# Altium PCB Therm_Expand_PCB_BottomBoard.PcbDoc
Units mil, origin at the board's own origin, x right, y up, seen from the top; angles counter-clockwise.
Board outline 3325 x 2597 mil, 2 copper layers (Top Layer, Bottom Layer); 43 components, 59 nets, 229 pads, 138 vias.
Unrouted connection lines stored in the file: 3.
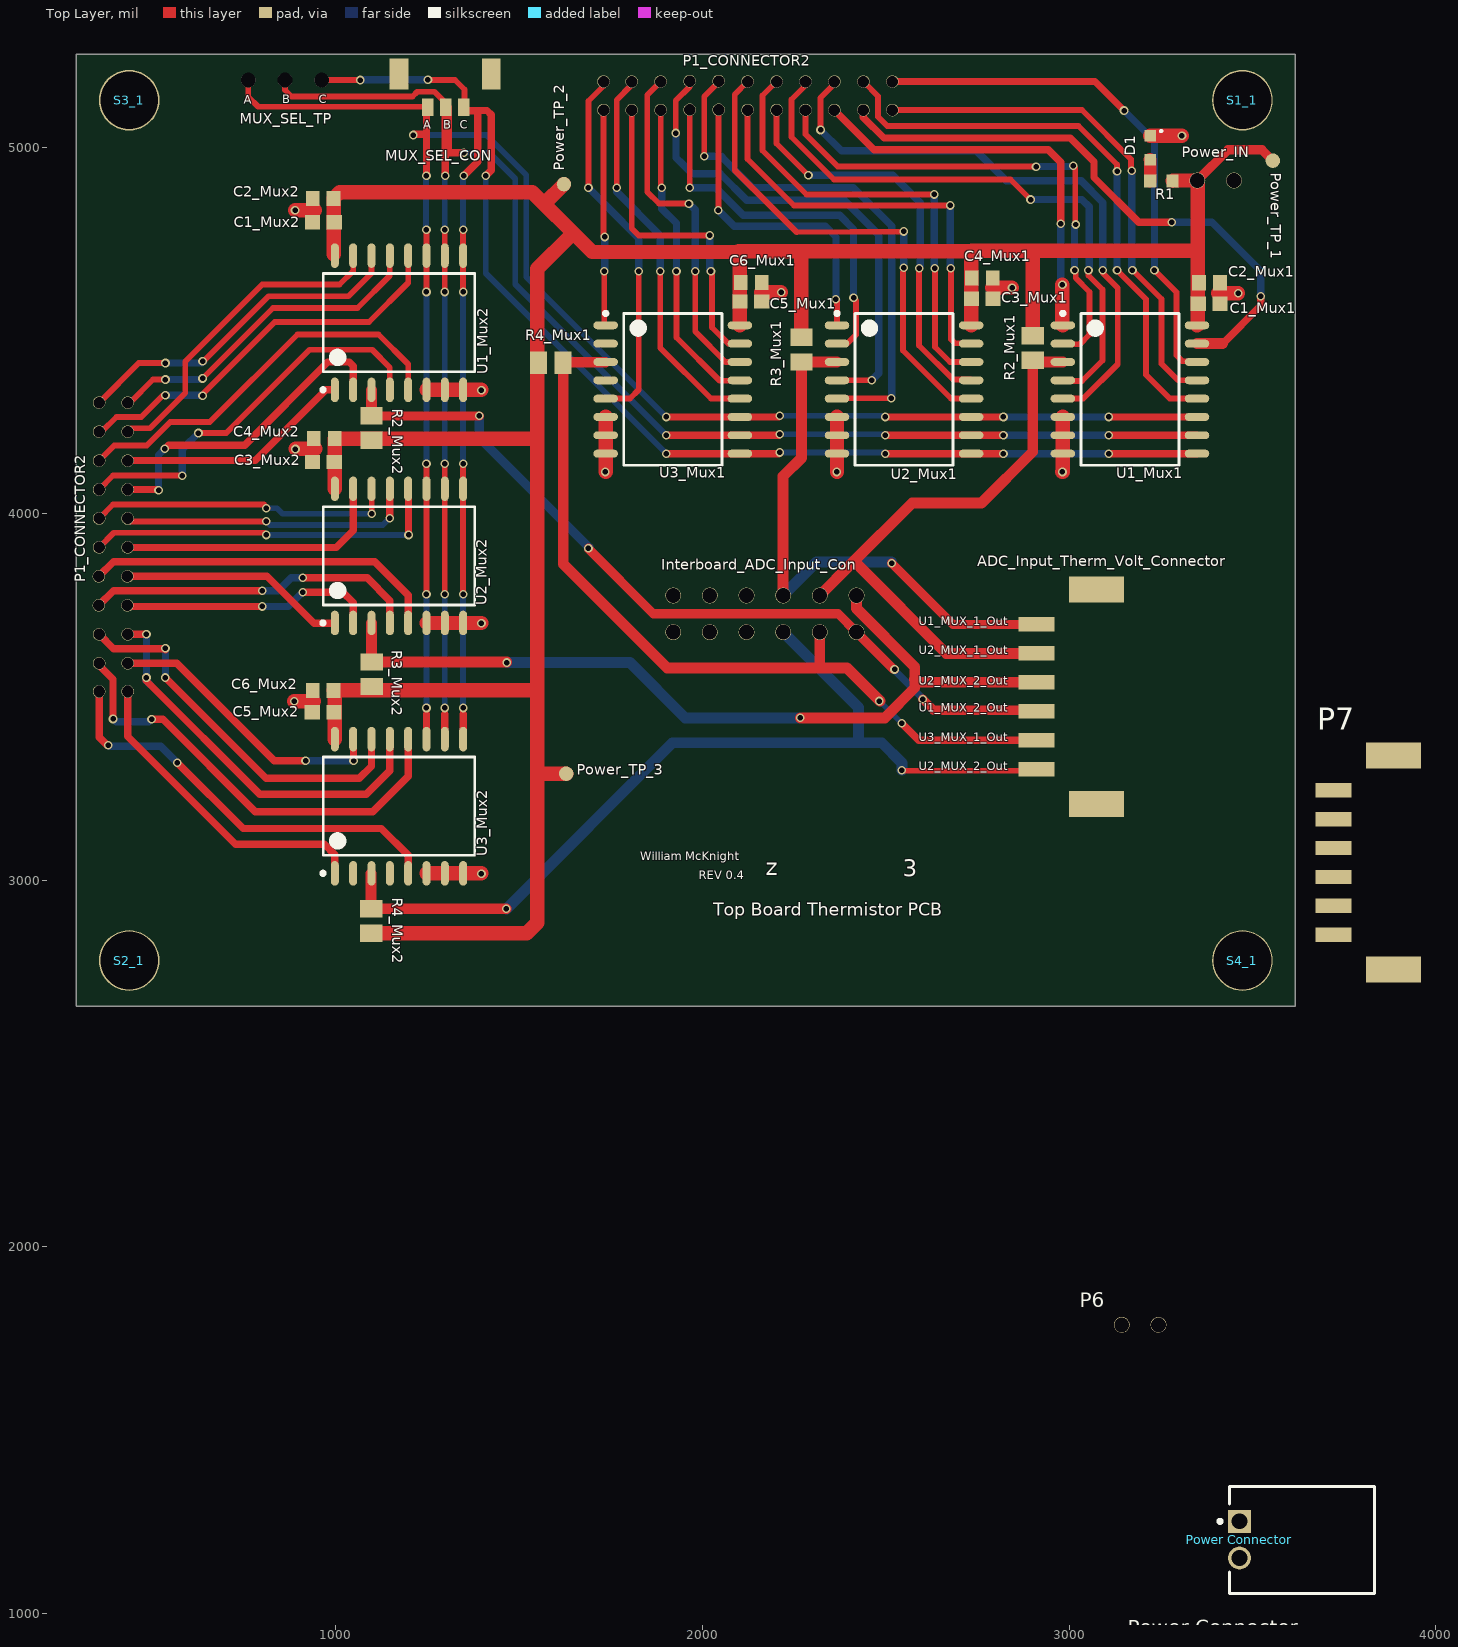
[diagram p0: Top Layer view]
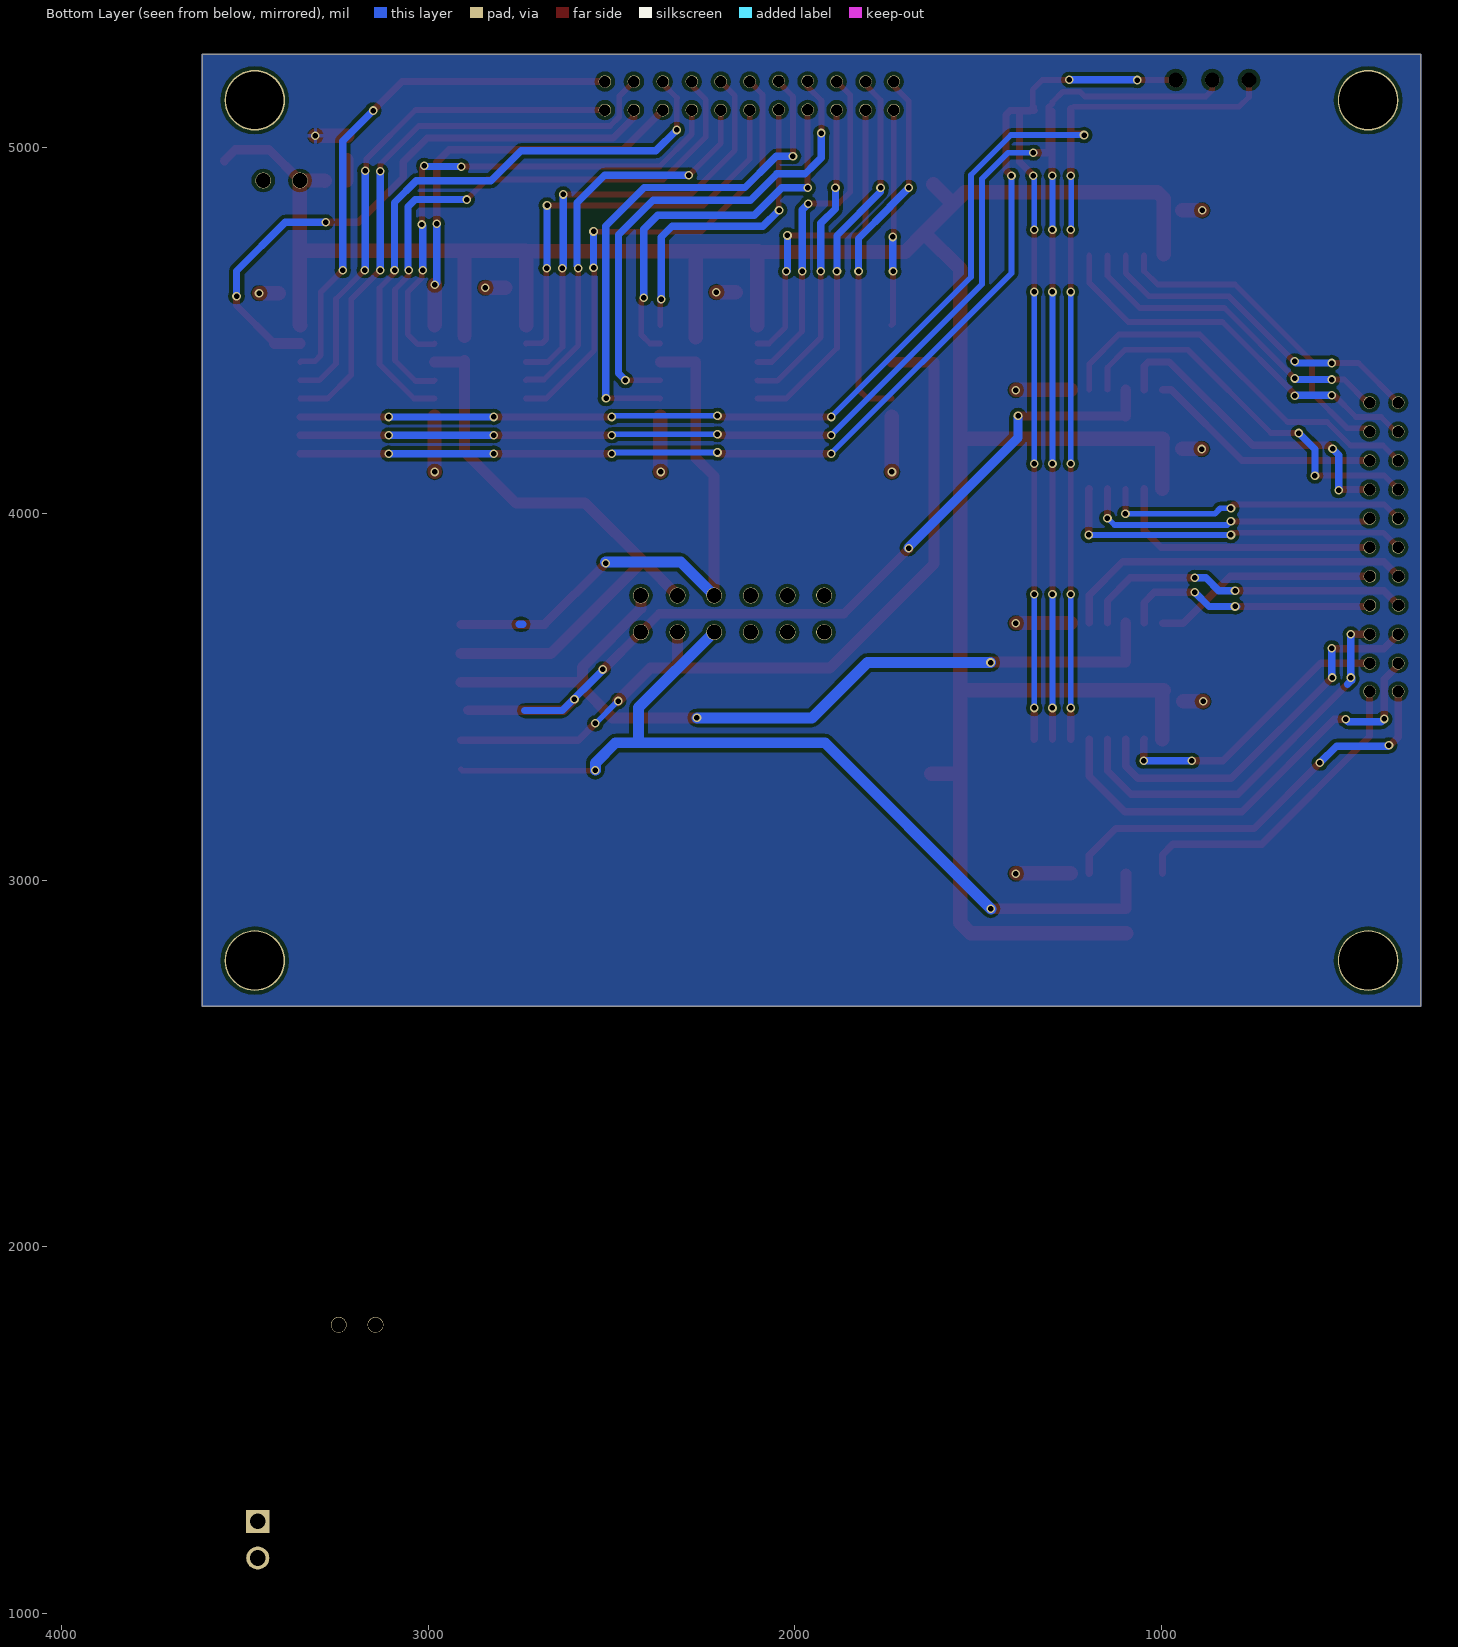
[diagram p1: Bottom Layer view, seen from below]

## Layer stack, top to bottom
Top Solder: solder mask 0.4, Solder Resist, Dk 3.5
Top Layer: signal copper 1.4
Dielectric 1: dielectric 12.6, FR-4, Dk 4.8
Bottom Layer: signal copper 1.4
Bottom Solder: solder mask 0.4, Solder Resist, Dk 3.5

## Board outline
292,2656 3617,2656 3617,5253 292,5253

## Design rules (kind name [scope] priority, off if disabled: settings)
Clearance [All] p1: gap=10 ignorepadtopadclearanceinfootprint=FALSE except(0: Arc-Hole Track-Hole SMDPad-Hole THPad-Hole Via-Hole Fill-Hole Poly-Hole Region-Hole Text-Hole; 5: Arc-Via Track-Via THPad-THPad; 6: Arc-Arc Arc-Track Track-Track)
PolygonConnect [All] p1: connectstyle=Relief reliefconductorwidth=10 reliefentries=4 polygonreliefangle="90 Angle" airgapwidth=10
RoutingVias [All] p1: holewidth=15 width=20 viastyle="Through Hole" minholewidth=12 minwidth=18 maxholewidth=28 maxwidth=32
ShortCircuit [All] p1: allowed=TRUE
SolderMaskExpansion [All] p1: expansion=4
Width [All] p1: maxlimit=100 minlimit=6 preferedwidth=15 minimp=50.000000 maximp=50.000000 favimp=50.000000
29 further rules are at their usual default settings.

## Classes and differential pairs
channel class Multiplexers: Data_TransferA_U_Single_Mux1 Data_TransferB_U_Single_Mux2
channel class MID: Data_TransferA Data_TransferB
channel class 50Pin_Connector: Data_TransferA_U_AHK50H-ND_THERM_CONNECTOR1 Data_TransferB_U_AHK50H-ND_THERM_CONNECTOR2
net class ADC_OUTC[1..2]: ADC_OUTC1 ADC_OUTC2
net class ADC_OUTB[1..2]: ADC_OUTB1 ADC_OUTB2
net class ADC_OUTA[1..2]: ADC_OUTA1 ADC_OUTA2
component class U_Data_Conversion: D1 P6 P7

## Components (designator, comment, footprint, x,y, rotation, side; value= is the part's Value field where it differs from the comment)
ADC_Input_Therm_Volt_Connector "6Pos_ADC_Volt_Test_Connector" 6POS_ADC_Volt_TEST 2911,3303 r90 top
C1_Mux1 "0.1uF" "0.1uF Bypass Capacitor" 3382,4573 r180 top
C1_Mux2 "0.1uF" "0.1uF Bypass Capacitor" 966,4795 r0 top
C2_Mux1 "1uF" 1UF_SAMSUNG 3383,4630 r180 top
C2_Mux2 "1uF" 1UF_SAMSUNG 965,4860 r0 top
C3_Mux1 "0.1uF" "0.1uF Bypass Capacitor" 2763,4586 r180 top
C3_Mux2 "0.1uF" "0.1uF Bypass Capacitor" 966,4141 r0 top
C4_Mux1 "1uF" 1UF_SAMSUNG 2763,4643 r180 top
C4_Mux2 "1uF" 1UF_SAMSUNG 968,4205 r0 top
C5_Mux1 "0.1uF" "0.1uF Bypass Capacitor" 2132,4579 r180 top
C5_Mux2 "0.1uF" "0.1uF Bypass Capacitor" 965,3458 r0 top
C6_Mux1 "1uF" 1UF_SAMSUNG 2133,4631 r180 top
C6_Mux2 "1uF" 1UF_SAMSUNG 965,3518 r0 top
D1 "LED" Green_SMD_LED 3285,5377 r270 top
Interboard_ADC_Input_Con "12 POS ADC Header" "12 POS Dual Header" 1920,3677 r0 top
MUX_SEL_CON "3_POS_MEX_SEL" 3POS_MUX_SEL 1349,5109 r180 top
MUX_SEL_TP "3 POS Mux Select Header" "Mux Select 3 Pos Header Pin" 961,5183 r180 top
P1_CONNECTOR2 "22-Pin-Connector" "22-PIN CONENCTOR" 13916,17320 r90 top
P1_CONNECTOR2 "22-Pin-Connector" "22-PIN CONENCTOR" 15535,-8383 r0 top
P6 "2 Pos Power Header" "2 POS Power Header" 3244,1787 r180 top
P7 "6Pos_ADC_Volt_Test_Connector" 6POS_ADC_Volt_TEST 3721,2851 r90 top
"Power Connector" "2Pos Power Connector" "2POS POWER CONNECTOR" 3464,1200 r90 top
Power_IN "2 Pos Power Header without 3D body" "2 Pos Power Header - duplicate" 3350,4909 r0 top
Power_TP_1 "Test Point" "Test Point" 3556,4963 r90 top
Power_TP_2 "Test Point" "Test Point" 1622,4899 r90 top
Power_TP_3 "Test Point" "Test Point" 1628,3291 r90 top
R1 "Green" Green_LED_Resistor_90.9 3252,4908 r0 top
R2_Mux1 "6.49kOhm SMD Resistor" RESC2012X06N 2901,4452 r90 top
R2_Mux2 "6.49kOhm SMD Resistor" RESC2012X06N 1097,4233.54 r270 top
R3_Mux1 "6.49kOhm SMD Resistor" RESC2012X06N 2270,4447.54 r90 top
R3_Mux2 "6.49kOhm SMD Resistor" RESC2012X06N 1098,3562 r270 top
R4_Mux1 "6.49kOhm SMD Resistor" RESC2012X06N 1586,4412 r180 top
R4_Mux2 "6.49kOhm SMD Resistor" RESC2012X06N 1096,2889 r270 top
S1_1 "#6-32 Standoff" "#6-32 Stand Off"#1 3877,6335 r0 top
S2_1 "#6-32 Standoff" "#6-32 Stand Off"#2 840,3988 r0 top
S3_1 "#6-32 Standoff" "#6-32 Stand Off"#3 840,6335 r0 top
S4_1 "#6-32 Standoff" "#6-32 Stand Off"#4 3877,3988 r0 top
U1_Mux1 "8:1 - MUX" "8X1 16SOIC MUX" 3166,4339 r0 top
U1_Mux2 "8:1 - MUX" "8X1 16SOIC MUX" 1172,4521 r90 top
U2_Mux1 "8:1 - MUX" "8X1 16SOIC MUX" 2550,4339 r0 top
U2_Mux2 "8:1 - MUX" "8X1 16SOIC MUX" 1172,3885 r90 top
U3_Mux1 "8:1 - MUX" "8X1 16SOIC MUX" 1919,4339 r0 top
U3_Mux2 "8:1 - MUX" "8X1 16SOIC MUX" 1172,3202 r90 top

## Footprints (in the part's own frame and the unit in brackets; to place one, negate y for a bottom-side part, rotate by r counter-clockwise, add the part's x,y. Pads: shape width x height; smd on the part's side, far side on the other; paste and mask are expansions set on the pad)
"0.1uF Bypass Capacitor" [mm] "Chip Capacitor, 2-Leads, Body 1.60x0.80mm, IPC Medium Density"
  rect 1.05x1 smd: 1(-0.75,0) 2(0.75,0)
  body extent -0.87,-0.48 0.87,0.48, height 0.9
1UF_SAMSUNG [mm]
  rect 0.95x1.05 smd: 1(-0.725,0) 2(0.725,0)
  body extent -0.85,-0.45 0.85,0.45, height 0.9
"2 POS Power Header" [mm] "Connecting Power between boards"
  round 1.1 hole 1.02: 1(0,0) 2(2.54,0)
  body extent -1.54,-1.3 3.92,1.24, height 10.04
"2 Pos Power Header - duplicate" [mm] "Without 3D body,"
  round 1.1 hole 1.02: 1(0,0) 2(2.54,0)
"2POS POWER CONNECTOR" [mm]
  rect 1.6x1.6 hole 1.09: 1(1.295,-0.025)
  round 1.6 hole 1.09: 2(-1.245,-0.025)
  silkscreen extent -3.71,-9.38 3.71,1.45, body extent -3.66,-12.91 3.71,0.67, height 6.98
3POS_MUX_SEL [mm] "CONN HEADER SMD R/A 3POS 1.25MM"
  rect 0.8x1.2 smd: 1(0,0) 2(1.245,0) 3(2.489,0)
  rect 1.3x2.15 smd: 4(-1.905,-2.286) 5(4.496,-2.286)
  body extent -2.28,-3.84 4.72,0.36, height 3.91
6POS_ADC_Volt_TEST [mm] "CONN HEADER SMD R/A 6POS 2MM"
  rect 1x2.5 smd: 1(0,0) 2(2.007,0) 3(4.013,0) 4(6.02,0) 5(8.026,0) 6(10.033,0)
  rect 1.8x3.8 smd: 7(-2.413,-4.166) 8(12.446,-4.166)
"8X1 16SOIC MUX" [mm] "IC MUX/DEMUX 8X1 16SOIC"
  oval 1.7x0.55 smd: 1(-4.65,4.445) 2(-4.65,3.175) 3(-4.65,1.905) 4(-4.65,0.635) 5(-4.65,-0.635) 6(-4.65,-1.905) 7(-4.65,-3.175) 8(-4.65,-4.445) 9(4.65,-4.445) 10(4.65,-3.175) 11(4.65,-1.905) 12(4.65,-0.635) 13(4.65,0.635) 14(4.65,1.905) 15(4.65,3.175) 16(4.65,4.445)
  silkscreen extent -4.77,-5.25 3.4,5.39, body extent -5.15,-5.25 5.15,5.25, height 2.65
"12 POS Dual Header" [mm] "Board to Board ADC Channel Header"
  round 1.1 hole 1.02: 1(0,0) 2(0,2.54) 3(2.54,2.54) 4(2.54,0) 5(5.08,0) 6(5.08,2.54) 7(7.62,2.54) 8(7.62,0) 9(10.16,0) 10(10.16,2.54) 11(12.7,2.54) 12(12.7,0)
  body extent -1.27,-3.18 13.97,4.7, height 20.46
"22-PIN CONENCTOR" [mil]
  round 34 hole 31.5: 1(-13017,13484) 2(-13017,13562) 3(-13096,13484) 4(-13096,13562) 5(-13175,13484) 6(-13175,13562) 7(-13254,13484) 8(-13254,13562) 9(-13333,13484) 10(-13333,13562) 11(-13412,13484) 12(-13412,13562) 13(-13491,13485) 14(-13491,13563) 15(-13570,13485) 16(-13570,13563) 17(-13649,13484) 18(-13649,13562) 19(-13728,13484) 20(-13728,13562) 21(-13805,13484) 22(-13805,13562)
  body extent -13883,13472 -12939,13866, height 199
"#6-32 Stand Off"#1 [mm]
  round 4.2 hole 4: S1(-10.262,-30.658)
  body extent -13.92,-33.83 -6.6,-27.48, height 10.32
"#6-32 Stand Off"#2 [mm]
  round 4.2 hole 4: S3(-10.262,-30.658)
  body extent -13.92,-33.83 -6.6,-27.48, height 10.32
"#6-32 Stand Off"#3 [mm]
  round 4.2 hole 4: S2(-10.262,-30.658)
  body extent -13.92,-33.83 -6.6,-27.48, height 10.32
"#6-32 Stand Off"#4 [mm]
  round 4.2 hole 4: S4(-10.262,-30.658)
  body extent -13.92,-33.83 -6.6,-27.48, height 10.32
Green_LED_Resistor_90.9 [mm]
  rect 0.85x0.9 smd: 1(-0.775,0) 2(0.775,0)
  body extent -0.85,-0.45 0.85,0.45, height 0.55
Green_SMD_LED [mil]
  rect 31.5x31.5 smd: 1(346,-64) 2(411,-64)
  silkscreen extent 332,-35 334,-33, body extent 346,-79 410,-48, height 28
"Mux Select 3 Pos Header Pin" [mm]
  round 1 hole 1.02: 1(0,0) 2(2.54,0) 3(5.08,0)
  body extent -1.19,-7.26 6.43,1.24, height 5.77
RESC2012X06N [mm] "Chip Resistor, 2-Leads, Body 2.00x1.25mm, IPC Medium Density"
  rect 1.2x1.55 smd: 1(-0.85,0) 2(0.85,0)
  body extent -1.1,-0.58 1.1,0.58, height 0.6
"Test Point" [mm]
  round 1 smd: 1(0,0)

## Part data
ADC_Input_Therm_Volt_Connector P7: "Connector Header Surface Mount, Right Angle 6 position 0.079\" (2.00mm)", Manufacturer=Molex, Manufacturer Part Number=5055780671, Supplier Part Number 1=WM17945CT-ND, Pricing 1="1=1.02000, 10=0.89300, 100=0.77050 (USD)", RoHS=No, Stock 1=3435, Supplier 1=Digi-Key
C1_Mux1 C1_Mux2 C3_Mux1 C3_Mux2 C5_Mux1 C5_Mux2: library part "0.1uF Cap", "0.1uF Bypass Cap", Case/Package=0603, Case Code (Metric)=1608, Dielectric=X7R, Dielectric Material=Ceramic, Manufacturer=KEMET, Manufacturer Part Number=C0603C104K9RACTU, Max Operating Temperature=125°C, Min Operating Temperature=-55°C, Package Quantity=4000, Supplier Part Number 1=399-15351-1-ND, Tolerance=10%, Voltage Rating=6.3V, Case Code (Imperial)=0603, ComponentLink1Description=https://datasheet.ciiva.com/13371/kem-c1002-x7r-smd-357932-13371879.pdf?src-supplier=Mouser, ComponentLink1URL=https://datasheet.ciiva.com/13371/kem-c1002-x7r-smd-357932-13371879.pdf?src-supplier=Mouser, Dissipation Factor=5%, Height=0.8mm, Length=1.6mm, Mount="Surface Mount", Packaging="Tape and Reel", Pricing 1="1=0.19000, 10=0.13800, 100=0.06480, 500=0.04546, 1000=0.03763 (USD)", RoHS=Yes, Stock 1=758, Supplier 1=Digi-Key, Termination=SMD/SMT, Thickness=0.034inch, Voltage Rating (DC)=6.3V, Width=0.8mm
C2_Mux1 C2_Mux2 C4_Mux1 C4_Mux2 C6_Mux1 C6_Mux2: library part "1uF Samsung Cap", "1uF Samsung Cap", Case/Package=0603, Case Code (Metric)=1608, Dielectric=X7R, Manufacturer=Samsung, Manufacturer Part Number=CL10B105KP8NNNC, Max Operating Temperature=125°C, Min Operating Temperature=-55°C, Package Quantity=1, Supplier Part Number 1=1276-1946-1-ND, Tolerance=10%, Voltage Rating=10V, Capacitance=1uF, Case Code (Imperial)=0603, ComponentLink1Description=https://media.digikey.com/pdf/Data%20Sheets/Samsung%20PDFs/CL_Series_MLCC_ds.pdf?src-supplier=Digi-Key, ComponentLink1URL=https://media.digikey.com/pdf/Data%20Sheets/Samsung%20PDFs/CL_Series_MLCC_ds.pdf?src-supplier=Digi-Key, ComponentLink2Description=http://www1.futureelectronics.com/doc/SAMSUNG/CL10B105KP8NNNC.pdf?src-supplier=Future+Electronics, ComponentLink2URL=http://www1.futureelectronics.com/doc/SAMSUNG/CL10B105KP8NNNC.pdf?src-supplier=Future+Electronics, ComponentLink3Description=https://www.verical.com/server-webapp/html/getDatasheet?partID=358410&src-supplier=Verical, ComponentLink3URL=https://www.verical.com/server-webapp/html/getDatasheet?partID=358410&src-supplier=Verical, Contact Plating=Tin, Depth=0.8mm, Height=0.8mm, Lead Free="Lead Free", Length=1.6mm, Mount="Surface Mount", Packaging="Tape and Reel", Pricing 1="1=0.1, 10=0.052, 100=0.0233, 500=0.0166, 1000=0.0131 (USD)", Radiation Hardening=No, Stock 1=10781730, Supplier 1=Digi-Key, Thickness=0.035inch, Voltage Rating (DC)=10V, Width=0.031inch
D1: library part GREEN_LED, Case/Package=0603, Case Code (Metric)=1608, Color=Green, Forward Current=20mA, Forward Voltage=2V, Lens Color=Colorless,Clear, Manufacturer=Dialight, Manufacturer Part Number=5988070107F, Max Operating Temperature=100°C, Min Operating Temperature=-30°C, Package Quantity=4000, Power Dissipation=60mW, Reverse Voltage=5V, Supplier Part Number 1=350-2035-1-ND, Case Code (Imperial)=0603, ComponentLink1Description=http://www.mouser.com/ds/2/109/SMT_selector_guide-267443.pdf?src-supplier=Mouser, ComponentLink1URL=http://www.mouser.com/ds/2/109/SMT_selector_guide-267443.pdf?src-supplier=Mouser, ComponentLink2Description=http://uk.rs-online.com/webdocs/0ae2/0900766b80ae2975.pdf?src-supplier=RSComponents, ComponentLink2URL=http://uk.rs-online.com/webdocs/0ae2/0900766b80ae2975.pdf?src-supplier=RSComponents, ComponentLink3Description=http://www.farnell.com/datasheets/1720200.pdf?src-supplier=Element14, ComponentLink3URL=http://www.farnell.com/datasheets/1720200.pdf?src-supplier=Element14, ComponentLink4Description=https://media.digikey.com/pdf/Data%20Sheets/Dialight%20PDFs/598_Series_0603_Pkg.pdf?src-supplier=Digi-Key, ComponentLink4URL=https://media.digikey.com/pdf/Data%20Sheets/Dialight%20PDFs/598_Series_0603_Pkg.pdf?src-supplier=Digi-Key, ComponentLink5Description=http://www.farnell.com/datasheets/1484480.pdf?src-supplier=Element14, ComponentLink5URL=http://www.farnell.com/datasheets/1484480.pdf?src-supplier=Element14, ComponentLink6Description=https://www.alliedelec.com/m/d/745256ca487aea7b70ea31e2d673d5bb.pdf?src-supplier=Allied+Electronics, ComponentLink6URL=https://www.alliedelec.com/m/d/745256ca487aea7b70ea31e2d673d5bb.pdf?src-supplier=Allied+Electronics, ComponentLink7Description=http://www.onlinecomponents.com/productFiles/mf-DIA/mdei5980603.pdf?src-supplier=Onlinecomponents.com, ComponentLink7URL=http://www.onlinecomponents.com/productFiles/mf-DIA/mdei5980603.pdf?src-supplier=Onlinecomponents.com, ComponentLink8Description=https://www.verical.com/server-webapp/html/getDatasheet?partID=146438&src-supplier=Verical, ComponentLink8URL=https://www.verical.com/server-webapp/html/getDatasheet?partID=146438&src-supplier=Verical, ComponentLink9Description=http://www.dialight.com/Assets/Brochures_And_Catalogs/Indication/SMT_selector_guide.pdf?src-supplier=Future+Electronics, ComponentLink9URL=http://www.dialight.com/Assets/Brochures_And_Catalogs/Indication/SMT_selector_guide.pdf?src-supplier=Future+Electronics, Depth=0.8mm, Dominant Wavelength=568nm, Height=0.7mm, Illumination Color=Green, Lead Free="Lead Free", Length=1.6mm, Lens Size=0.8mm, Lens Style=Flat,Rectangular,Diffused,Colorless,Clear, Lens Transparency=Clear, Luminous Intensity=20mcd, Mount="Surface Mount", Number of Elements=1, Number of LEDs=1, Number of Pins=2, Packaging="Tape and Reel", Pricing 1="1=0.46, 10=0.33, 25=0.2528, 100=0.1648, 250=0.1209, 500=0.1026, 1000=0.0843 (USD)", Radiation Hardening=No, REACH SVHC="No SVHC", Stock 1=228546, Supplier 1=Digi-Key, Test Current=20mA, Viewing Angle=140°, Wavelength=570nm, Width=0.8mm
Interboard_ADC_Input_Con: "Interboard connector for thermistors connecting to ADC", Color=Black, Manufacturer=3M, Manufacturer Part Number=929715-06-06-EU, Package Quantity=500, Supplier Part Number 1=3M156375-12-ND, ComponentLink1Description=http://www.mouser.com/ds/2/1/ts0769-35914.pdf?src-supplier=Mouser, ComponentLink1URL=http://www.mouser.com/ds/2/1/ts0769-35914.pdf?src-supplier=Mouser, ComponentLink2Description=http://components.arrow.com/part/dataview/42715320S8912076N3321?src-supplier=Arrow, ComponentLink2URL=http://components.arrow.com/part/dataview/42715320S8912076N3321?src-supplier=Arrow, ComponentLink3Description=http://multimedia.3m.com/mws/mediawebserver?66666UuZjcFSLXTtmXME5x46EVuQEcuZgVs6EVs6E666666--?src-supplier=Digi-Key, ComponentLink3URL=http://multimedia.3m.com/mws/mediawebserver?66666UuZjcFSLXTtmXME5x46EVuQEcuZgVs6EVs6E666666--?src-supplier=Digi-Key, Connector Type="Male Pin", Contact Mating Length=0.318inch, Contact Plating=Gold, Gender=Male, Mount="Through Hole", Number of Positions=12, Number of Rows=2, Packaging=Bulk, Pitch=0.1inch, Pricing 1="1=1.86000, 10=1.69000, 25=1.58600, 50=1.51720, 100=1.44820, 250=1.31024, 500=1.20680 (USD)", RoHS=Yes, Row Spacing=0.1inch, Stock 1=0, Supplier 1=Digi-Key, Termination=Solder
MUX_SEL_CON: "Connector Header Surface Mount, Right Angle 3 position 0.049\" (1.25mm)", Flammability Rating="UL94 V-0", Insulation Color=Black, Manufacturer=Molex, Manufacturer Part Number=505567-0371, Max Operating Temperature=105°C, Min Operating Temperature=-40°C, Supplier Part Number 1=WM17039CT-ND, ComponentLink1Description=https://www.molex.com/pdm_docs/sd/5055670371_sd.pdf?src-supplier=Digi-Key, ComponentLink1URL=https://www.molex.com/pdm_docs/sd/5055670371_sd.pdf?src-supplier=Digi-Key, ComponentLink2Description=http://www.farnell.com/datasheets/2551041.pdf?src-supplier=Newark, ComponentLink2URL=http://www.farnell.com/datasheets/2551041.pdf?src-supplier=Newark, Connector Type="Header,Male Pin", Contact Material=Brass, Contact Plating=Tin, Contact Shape=Square, Fastening Type=Ramp, Insulation Material=Nylon, Mount="Surface Mount", Number of Positions=3, Number of Rows=1, Packaging="Cut Tape", Pricing 1="1=0.84000, 10=0.74100, 100=0.63940, 500=0.52312 (USD)", RoHS=No, Stock 1=2041, Supplier 1=Digi-Key, Termination=Solder
MUX_SEL_TP: "Mux Sel Header TP", Manufacturer="Adam Equipment", Manufacturer Part Number=PH1RA-03-UA, Supplier Part Number 1=2057-PH1RA-03-UA-ND, ComponentLink1Description=https://datasheet.ciiva.com/16476/page-292-295-16476086.pdf?src-supplier=Future+Electronics, ComponentLink1URL=https://datasheet.ciiva.com/16476/page-292-295-16476086.pdf?src-supplier=Future+Electronics, Lead Free="Lead Free", Pricing 1="1=0.12000, 10=0.11300, 100=0.06960, 500=0.05760, 1000=0.05040, 5000=0.04320, 10000=0.04200 (USD)", RoHS=Yes, Stock 1=4630, Supplier 1=Digi-Key
P1_CONNECTOR2 P1_CONNECTOR2: Color=Black, Contact Resistance=30mR, Current Rating=2A, Manufacturer=Hirose, Manufacturer Part Number=DF11-22DP-2DS(24), Max Operating Temperature=85°C, Min Operating Temperature=-30°C, Package Quantity=20, Supplier Part Number 1=H10253-ND, Voltage Rating=250V, ComponentLink1Description=http://docs-usa.electrocomponents.com/techlib:/itc_doclist_US.htm?stockno=6888963&src-supplier=Allied+Electronics, ComponentLink1URL=http://docs-usa.electrocomponents.com/techlib:/itc_doclist_US.htm?stockno=6888963&src-supplier=Allied+Electronics, ComponentLink2Description=https://www.verical.com/server-webapp/html/getDatasheet?partID=456315&src-supplier=Verical, ComponentLink2URL=https://www.verical.com/server-webapp/html/getDatasheet?partID=456315&src-supplier=Verical, ComponentLink3Description=http://www.hirose.co.jp/cataloge_hp/en_DF11_20130411.pdf?src-supplier=Future+Electronics, ComponentLink3URL=http://www.hirose.co.jp/cataloge_hp/en_DF11_20130411.pdf?src-supplier=Future+Electronics, ComponentLink4Description=http://www.farnell.com/datasheets/91550.pdf?src-supplier=Element14, ComponentLink4URL=http://www.farnell.com/datasheets/91550.pdf?src-supplier=Element14, ComponentLink5Description=http://www.mouser.com/ds/2/185/DF11_catalog-1064296.pdf?src-supplier=Mouser, ComponentLink5URL=http://www.mouser.com/ds/2/185/DF11_catalog-1064296.pdf?src-supplier=Mouser, ComponentLink6Description=http://documents.rs-components.com/techlib://itc_doclist_GB.htm?stockno=6056598&src-supplier=RSComponents, ComponentLink6URL=http://documents.rs-components.com/techlib://itc_doclist_GB.htm?stockno=6056598&src-supplier=RSComponents, Connector Type="Male Pin", Contact Material="Brass,Copper Alloy,Tin", Contact Mating Length=0.118inch, Contact Plating=Tin, Depth=10mm, Fastening Type=Detent, Gender=Male, Height=5mm, Housing Color=Black, Housing Material=Polyamide, Lead Free="Lead Free", Length=24mm, Max Current Rating=2A, Mount="Through Hole", Number of Contacts=22, Number of Positions=22, Number of Rows=2, Orientation="Right Angle", Packaging=Rail/Tube, Pitch=2mm, Pricing 1="1=1.19, 20=1.0455, 100=0.902, 500=0.738, 1000=0.656 (USD)", Radiation Hardening=No, Row Spacing=0.079inch, Stock 1=536, Supplier 1=Digi-Key, System=Connector, Termination=Solder
P6: Color=Black, Current Rating=2.5A, Manufacturer=3M, Manufacturer Part Number=929715-06-01-EU, Max Operating Temperature=105°C, Min Operating Temperature=-40°C, Package Quantity=1000, Supplier Part Number 1=3M156375-02-ND, ComponentLink1Description=https://datasheet.ciiva.com/5147/ts0769-35914-5147696.pdf?src-supplier=Mouser, ComponentLink1URL=https://datasheet.ciiva.com/5147/ts0769-35914-5147696.pdf?src-supplier=Mouser, ComponentLink2Description=https://datasheet.ciiva.com/6818/ts0769-6818155.pdf?src-supplier=Digi-Key, ComponentLink2URL=https://datasheet.ciiva.com/6818/ts0769-6818155.pdf?src-supplier=Digi-Key, Connector Type="Male Pin", Contact Gender=Male, Contact Material="Copper Alloy", Contact Mating Length=0.318inch, Contact Plating=Gold, Gender=Male, Housing Material=Polycyclohexylenedimethylene, Mount="Through Hole", Number of Positions=2, Number of Rows=2, Packaging=Bulk, Pitch=2.54mm, Pricing 1="1=0.43000, 10=0.40200, 25=0.34480, 50=0.29300, 100=0.28160, 250=0.25284, 500=0.24136 (USD)", RoHS=Yes, Row Spacing=0.1inch, Stock 1=0, Supplier 1=Digi-Key, Termination=Solder
"Power Connector": "Headers & Wire Housings R/A HDR 2P low profile single", Color=Black, Contact Resistance=30mR, Current Rating=3A, Flammability Rating="UL94 V-0", Insulation Resistance=1GR, Manufacturer=Molex, Manufacturer Part Number=70553-0001, Max Operating Temperature=105°C, Min Operating Temperature=-40°C, Package Quantity=2880, Supplier Part Number 1=WM4900-ND, Voltage Rating=250V, Approvals=UL, ComponentLink1Description=https://datasheet.ciiva.com/5158/0705530001-pcb-headers-172944-5158768.pdf?src-supplier=Mouser, ComponentLink1URL=https://datasheet.ciiva.com/5158/0705530001-pcb-headers-172944-5158768.pdf?src-supplier=Mouser, ComponentLink2Description=https://datasheet.ciiva.com/11746/0900766b80d8d649-11746625.pdf?src-supplier=RSComponents, ComponentLink2URL=https://datasheet.ciiva.com/11746/0900766b80d8d649-11746625.pdf?src-supplier=RSComponents, ComponentLink3Description=https://datasheet.ciiva.com/16657/0705530001-pcb-headers-16657777.pdf?src-supplier=Avnet+Europe, ComponentLink3URL=https://datasheet.ciiva.com/16657/0705530001-pcb-headers-16657777.pdf?src-supplier=Avnet+Europe, ComponentLink4Description=https://datasheet.ciiva.com/7920/ps-70541-7920854.pdf?src-supplier=Element14, ComponentLink4URL=https://datasheet.ciiva.com/7920/ps-70541-7920854.pdf?src-supplier=Element14, ComponentLink5Description=https://datasheet.ciiva.com/30195/179180705530001-pcb-headers-30195548.pdf?src-supplier=Onlinecomponents.com, ComponentLink5URL=https://datasheet.ciiva.com/30195/179180705530001-pcb-headers-30195548.pdf?src-supplier=Onlinecomponents.com, ComponentLink6Description=https://datasheet.ciiva.com/1438/1887076-1438989.pdf?src-supplier=Element14, ComponentLink6URL=https://datasheet.ciiva.com/1438/1887076-1438989.pdf?src-supplier=Element14, ComponentLink7Description=https://datasheet.ciiva.com/10090/0705530001-pcb-headers-10090317.pdf?src-supplier=Avnet, ComponentLink7URL=https://datasheet.ciiva.com/10090/0705530001-pcb-headers-10090317.pdf?src-supplier=Avnet, Contact Material=Bronze, Contact Plating=Gold, ELV=Compliant, Gender=Male, Glow Wire Compliant=Non-compliant, Housing Color=Black, Housing Material=Thermoplastic, Lead Free="Lead Free", Material=Brass, Mount="Through Hole", Number of Circuits=2, Number of Contacts=2, Number of Positions=2, Number of Rows=1, Orientation="Right Angle", Packaging=Rail/Tube, Pitch=2.54mm, Pricing 1="1=0.71000, 72=0.53486, 144=0.51264, 504=0.44575, 1008=0.36775, 5040=0.32318, 10008=0.30089 (USD)", Radiation Hardening=No, REACH SVHC=Unknown, RoHS=Yes, Stock 1=8671, Supplier 1=Digi-Key, Termination="Through Hole", Voltage Rating (DC)=250V
Power_IN: "No supplier part for this schematic symbol, only here to create board to board holes for the power header"
R1: library part Green_LED_Res, Case/Package=0201, Case Code (Metric)=0603, Manufacturer=Panasonic, Manufacturer Part Number=ERJ-1GNF90R9C, Max Operating Temperature=125°C, Max Power Dissipation=50mW, Min Operating Temperature=-55°C, Package Quantity=15000, Resistance=90.9R, Supplier Part Number 1=311-90.9HRCT-ND, Temperature Coefficient=200ppm/°C, Tolerance=1%, Voltage Rating=25V, Voltage Rating (DC)=50V, Case Code (Imperial)=0201, ComponentLink1Description=https://datasheet.ciiva.com/15189/getdatasheetpartid-326528-15189836.pdf?src-supplier=Verical, ComponentLink1URL=https://datasheet.ciiva.com/15189/getdatasheetpartid-326528-15189836.pdf?src-supplier=Verical, ComponentLink2Description=https://datasheet.ciiva.com/12558/rc0603-272842-12558285.pdf?src-supplier=Mouser, ComponentLink2URL=https://datasheet.ciiva.com/12558/rc0603-272842-12558285.pdf?src-supplier=Mouser, Composition="Thick Film", Contact Plating=Tin,Matte, Depth=0.8mm, Height=0.01inch, Lead Free="Lead Free", Length=0.024inch, Military Standard=Not, Mount="Surface Mount", Number of Terminations=2, Packaging="Tape and Reel", Power Rating=50mW, Pricing 1="1=0.10000, 10=0.02400, 100=0.00970, 1000=0.00437, 2500=0.00379 (USD)", Radiation Hardening=No, RoHS=Yes, Stock 1=401780, Supplier 1=Digi-Key, Termination=SMD/SMT, Width=0.3mm
R2_Mux1 R2_Mux2 R3_Mux1 R3_Mux2 R4_Mux1 R4_Mux2: Case/Package=0805, Case Code (Metric)=2012, Manufacturer=Panasonic, Manufacturer Part Number=ERA6AEB6491V, Max Operating Temperature=155°C, Max Power Dissipation=125mW, Min Operating Temperature=-55°C, Package Quantity=1, Resistance=6.49K, Supplier Part Number 1=P6.49KDACT-ND, Temperature Coefficient=25ppm/°C, Tolerance=0.1%, Voltage Rating=100V, Case Code (Imperial)=0805, ComponentLink1Description=http://www.farnell.com/datasheets/485442.pdf?src-supplier=Farnell, ComponentLink1URL=http://www.farnell.com/datasheets/485442.pdf?src-supplier=Farnell, ComponentLink2Description=http://www.mouser.com/ds/2/315/AOA0000CE26-32660.pdf?src-supplier=Mouser, ComponentLink2URL=http://www.mouser.com/ds/2/315/AOA0000CE26-32660.pdf?src-supplier=Mouser, ComponentLink3Description=http://www.farnell.com/datasheets/2059650.pdf?src-supplier=Farnell, ComponentLink3URL=http://www.farnell.com/datasheets/2059650.pdf?src-supplier=Farnell, ComponentLink4Description=http://uk.rs-online.com/webdocs/0eb1/0900766b80eb1d8c.pdf?src-supplier=RSComponents, ComponentLink4URL=http://uk.rs-online.com/webdocs/0eb1/0900766b80eb1d8c.pdf?src-supplier=RSComponents, ComponentLink5Description=http://www.farnell.com/datasheets/485442.pdf?src-supplier=Element14, ComponentLink5URL=http://www.farnell.com/datasheets/485442.pdf?src-supplier=Element14, ComponentLink6Description=http://www.produktinfo.conrad.com/datenblaetter/1100000-1199999/001181295-da-01-en-WIDERSTAND_ERA_0805_6K49_0_1__5000ST.pdf?src-supplier=Conrad, ComponentLink6URL=http://www.produktinfo.conrad.com/datenblaetter/1100000-1199999/001181295-da-01-en-WIDERSTAND_ERA_0805_6K49_0_1__5000ST.pdf?src-supplier=Conrad, Composition="Thin Film,Metal Film", Contact Plating=Tin, Depth=1.25mm, Features="Automotive AEC-Q200", Height=0.5mm, Lead Free="Lead Free", Length=2mm, Military Standard=Not, Mount="Surface Mount", Number of Pins=2, Number of Terminations=2, Packaging="Tape and Reel", Power Rating=125mW, Pricing 1="1=0.36, 10=0.302, 100=0.1182, 1000=0.0495, 2500=0.0454 (USD)", Radiation Hardening=No, REACH SVHC="No SVHC", Stock 1=15147, Supplier 1=Digi-Key, Termination=SMD/SMT, Voltage Rating (DC)=100V, Width=1.25mm
S1_1 S2_1 S3_1 S4_1: "Hex Standoff for Thermistor Boards", Manufacturer=RAF, Manufacturer Part Number=2102T-632-AL-7, Package Quantity=100, Supplier Part Number 1=1772-1144-ND, Pricing 1="1=0.5, 25=0.3328, 100=0.2834, 250=0.2692, 500=0.2551, 1000=0.2409 (USD)", Stock 1=1687, Supplier 1=Digi-Key
U1_Mux1 U1_Mux2 U2_Mux1 U2_Mux2 U3_Mux1 U3_Mux2: "Current Therm 8:1 Mux", Case/Package=TSSOP, High Level Output Current=25mA, Manufacturer="Texas Instruments", Manufacturer Part Number=SN74LV4051ATPWRQ1, Max Operating Temperature=105°C, Max Supply Voltage=5.5V, Min Operating Temperature=-40°C, Min Supply Voltage=2V, On-State Resistance=75R, Operating Supply Current=20uA, Package Quantity=1, Supplier Part Number 1=296-37427-1-ND, -3db Bandwidth=35MHz, Bandwidth=35MHz, ComponentLink1Description=http://www.ti.com/lit/ds/symlink/sn74lv4051a-q1.pdf?src-supplier=Digi-Key, ComponentLink1URL=http://www.ti.com/lit/ds/symlink/sn74lv4051a-q1.pdf?src-supplier=Digi-Key, ComponentLink2Description=http://www.ti.com/lit/gpn/sn74lv4051a-q1?src-supplier=Mouser, ComponentLink2URL=http://www.ti.com/lit/gpn/sn74lv4051a-q1?src-supplier=Mouser, ComponentLink3Description=https://www.verical.com/server-webapp/html/getDatasheet?partID=137249&src-supplier=Verical, ComponentLink3URL=https://www.verical.com/server-webapp/html/getDatasheet?partID=137249&src-supplier=Verical, ComponentLink4Description=http://focus.ti.com/lit/ds/symlink/sn74lv4051a-q1.pdf?src-supplier=Avnet, ComponentLink4URL=http://focus.ti.com/lit/ds/symlink/sn74lv4051a-q1.pdf?src-supplier=Avnet, ComponentLink5Description=http://www.produktinfo.conrad.com/datenblaetter/1100000-1199999/001187277-da-01-en-IC_MUX_DE_SN74LV4051ATPWRQ1_TSSOP_16_TID.pdf?src-supplier=Conrad, ComponentLink5URL=http://www.produktinfo.conrad.com/datenblaetter/1100000-1199999/001187277-da-01-en-IC_MUX_DE_SN74LV4051ATPWRQ1_TSSOP_16_TID.pdf?src-supplier=Conrad, ComponentLink6Description=https://datasheet.ciiva.com/15127/getdatasheetpartid-348177-15127781.pdf?src-supplier=Verical, ComponentLink6URL=https://datasheet.ciiva.com/15127/getdatasheetpartid-348177-15127781.pdf?src-supplier=Verical, ComponentLink7Description=https://datasheet.ciiva.com/14435/sn74lv4051a-q1-14435640.pdf?src-supplier=Avnet, ComponentLink7URL=https://datasheet.ciiva.com/14435/sn74lv4051a-q1-14435640.pdf?src-supplier=Avnet, ComponentLink8Description=https://datasheet.ciiva.com/29645/sn74lv4051a-q1-29645693.pdf?src-supplier=Digi-Key, ComponentLink8URL=https://datasheet.ciiva.com/29645/sn74lv4051a-q1-29645693.pdf?src-supplier=Digi-Key, ComponentLink9Description=https://datasheet.ciiva.com/29645/sn74lv4051a-q1-29645694.pdf?src-supplier=Digi-Key, ComponentLink9URL=https://datasheet.ciiva.com/29645/sn74lv4051a-q1-29645694.pdf?src-supplier=Digi-Key, ComponentLink10Description=https://datasheet.ciiva.com/29645/sn74lv4051a-q1-29645695.pdf?src-supplier=Digi-Key, ComponentLink10URL=https://datasheet.ciiva.com/29645/sn74lv4051a-q1-29645695.pdf?src-supplier=Digi-Key, Contact Plating=Gold, Lead Free="Lead Free", Logic Function=Multiplexer,Demultiplexer, Low Level Output Current=25mA, Mount="Surface Mount", Number of Bits=8, Number of Channels=1, Number of Circuits=1, Number of Inputs=8, Number of Outputs=1, Number of Pins=16, Packaging="Tape and Reel", Pricing 1="1=0.72000, 10=0.63600, 100=0.48730, 500=0.38522, 1000=0.30818 (USD)", Propagation Delay=7ns, Radiation Hardening=No, REACH SVHC="No SVHC", RoHS=Yes, Stock 1=2492, Supplier 1=Digi-Key, Supply Type=Single, Turn-Off Delay Time=20ns, Turn-On Delay Time=20ns, Weight=0.002169oz

## Via types
v1: diameter 23.62, hole 15, Top Layer to Bottom Layer, tented top, 138 vias

## Nets (pads, with @x,y where several pads share a name; then routed paths per layer and width w, separated by ;. In a path a pad name is that pad's centre, name@x,y a point inside that pad or via, vN(x,y) a via of type N, cw(c..) or ccw(c..) an arc to the next point about the centre after c; other vN are vias at no path point)
+3.3V_AN: "Power Connector.1" P6.1
ADC_OUTA1: P7.5
ADC_OUTA2: P7.3
ADC_OUTB1: P7.6
ADC_OUTB2: P7.4
ADC_OUTC1: P7.2
ADC_OUTC2: P7.1
AGND: "Power Connector.2" D1.1 P6.2 | length 87
  Top Layer w39.37: D1.1 v1(3308,5031)
NetD1_2: D1.2
S0_1: 
S0_2: 
S1_1: 
S1_2: 
S2_1: 
S2_2: 
TS_IN1_1: 
TS_IN1_2: 
TS_IN2_1: 
TS_IN2_2: 
TS_IN3_1: 
TS_IN3_2: 
TS_IN4_1: 
TS_IN4_2: 
TS_IN5_1: 
TS_IN5_2: 
TS_IN6_1: 
TS_IN6_2: 
TS_IN7_1: 
TS_IN7_2: 
TS_IN8_1: 
TS_IN8_2: 
TS_IN9_1: 
TS_IN9_2: 
TS_IN10_1: 
TS_IN10_2: 
TS_IN11_1: 
TS_IN11_2: 
TS_IN12_1: 
TS_IN12_2: 
TS_IN13_1: 
TS_IN13_2: 
TS_IN14_1: 
TS_IN14_2: 
TS_IN15_1: 
TS_IN15_2: 
TS_IN16_1: 
TS_IN16_2: 
TS_IN17_1: 
TS_IN17_2: 
TS_IN18_1: 
TS_IN18_2: 
TS_IN19_1: 
TS_IN19_2: 
TS_IN20_1: 
TS_IN20_2: 
TS_IN21_1: 
TS_IN21_2: 
TS_IN22_1: 
TS_IN22_2: 
pads on no net: ADC_Input_Therm_Volt_Connector.1 ADC_Input_Therm_Volt_Connector.2 ADC_Input_Therm_Volt_Connector.3 ADC_Input_Therm_Volt_Connector.4 ADC_Input_Therm_Volt_Connector.5 ADC_Input_Therm_Volt_Connector.6 ADC_Input_Therm_Volt_Connector.7 ADC_Input_Therm_Volt_Connector.8 C1_Mux1.1 C1_Mux1.2 C1_Mux2.1 C1_Mux2.2 C2_Mux1.1 C2_Mux1.2 C2_Mux2.1 C2_Mux2.2 C3_Mux1.1 C3_Mux1.2 C3_Mux2.1 C3_Mux2.2 C4_Mux1.1 C4_Mux1.2 C4_Mux2.1 C4_Mux2.2 C5_Mux1.1 C5_Mux1.2 C5_Mux2.1 C5_Mux2.2 C6_Mux1.1 C6_Mux1.2 C6_Mux2.1 C6_Mux2.2 Interboard_ADC_Input_Con.1 Interboard_ADC_Input_Con.2 Interboard_ADC_Input_Con.3 Interboard_ADC_Input_Con.4 Interboard_ADC_Input_Con.5 Interboard_ADC_Input_Con.6 Interboard_ADC_Input_Con.7 Interboard_ADC_Input_Con.8 Interboard_ADC_Input_Con.9 Interboard_ADC_Input_Con.10 Interboard_ADC_Input_Con.11 Interboard_ADC_Input_Con.12 MUX_SEL_CON.1 MUX_SEL_CON.2 MUX_SEL_CON.3 MUX_SEL_CON.4 MUX_SEL_CON.5 MUX_SEL_TP.1 MUX_SEL_TP.2 MUX_SEL_TP.3 P1_CONNECTOR2.1 P1_CONNECTOR2.2 P1_CONNECTOR2.3 P1_CONNECTOR2.4 P1_CONNECTOR2.5 P1_CONNECTOR2.6 P1_CONNECTOR2.7 P1_CONNECTOR2.8 P1_CONNECTOR2.9 P1_CONNECTOR2.10 P1_CONNECTOR2.11 P1_CONNECTOR2.12 P1_CONNECTOR2.13 P1_CONNECTOR2.14 P1_CONNECTOR2.15 P1_CONNECTOR2.16 P1_CONNECTOR2.17 P1_CONNECTOR2.18 P1_CONNECTOR2.19 P1_CONNECTOR2.20 P1_CONNECTOR2.21 P1_CONNECTOR2.22 P7.7 P7.8 Power_IN.1 Power_IN.2 Power_TP_1.1 Power_TP_2.1 Power_TP_3.1 R1.1 R1.2 R2_Mux1.1 R2_Mux1.2 R2_Mux2.1 R2_Mux2.2 R3_Mux1.1 R3_Mux1.2 R3_Mux2.1 R3_Mux2.2 R4_Mux1.1 R4_Mux1.2 R4_Mux2.1 R4_Mux2.2 S1_1.S1 S2_1.S3 S3_1.S2 S4_1.S4 U1_Mux1.1 U1_Mux1.2 U1_Mux1.3 U1_Mux1.4 U1_Mux1.5 U1_Mux1.6 U1_Mux1.7 U1_Mux1.8 U1_Mux1.9 U1_Mux1.10 U1_Mux1.11 U1_Mux1.12 U1_Mux1.13 U1_Mux1.14 U1_Mux1.15 U1_Mux1.16 U1_Mux2.1 U1_Mux2.2 U1_Mux2.3 U1_Mux2.4 U1_Mux2.5 U1_Mux2.6 U1_Mux2.7 U1_Mux2.8 U1_Mux2.9 U1_Mux2.10 U1_Mux2.11 U1_Mux2.12 U1_Mux2.13 U1_Mux2.14 U1_Mux2.15 U1_Mux2.16 U2_Mux1.1 U2_Mux1.2 U2_Mux1.3 U2_Mux1.4 U2_Mux1.5 U2_Mux1.6 U2_Mux1.7 U2_Mux1.8 U2_Mux1.9 U2_Mux1.10 U2_Mux1.11 U2_Mux1.12 U2_Mux1.13 U2_Mux1.14 U2_Mux1.15 U2_Mux1.16 U2_Mux2.1 U2_Mux2.2 U2_Mux2.3 U2_Mux2.4 U2_Mux2.5 U2_Mux2.6 U2_Mux2.7 U2_Mux2.8 U2_Mux2.9 U2_Mux2.10 U2_Mux2.11 U2_Mux2.12 U2_Mux2.13 U2_Mux2.14 U2_Mux2.15 U2_Mux2.16 U3_Mux1.1 U3_Mux1.2 U3_Mux1.3 U3_Mux1.4 U3_Mux1.5 U3_Mux1.6 U3_Mux1.7 U3_Mux1.8 U3_Mux1.9 U3_Mux1.10 U3_Mux1.11 U3_Mux1.12 U3_Mux1.13 U3_Mux1.14 U3_Mux1.15 U3_Mux1.16 U3_Mux2.1 U3_Mux2.2 U3_Mux2.3 U3_Mux2.4 U3_Mux2.5 U3_Mux2.6 U3_Mux2.7 U3_Mux2.8 U3_Mux2.9 U3_Mux2.10 U3_Mux2.11 U3_Mux2.12 U3_Mux2.13 U3_Mux2.14 U3_Mux2.15 U3_Mux2.16
copper on no net: | length 83912.1
  Top Layer w10: 1097,3596.46 1098,3595.46
  Top Layer w15: 1096,3017.93 1097,3018.93 ; v1@1464.54,2922.46 v1(1465,2922) ; v1@2544,3299 2907,3299 2911,3303
  Top Layer w15.75: 354,3908 394,3948 804,3948 v1(810,3942) ; 354,3987 392,4025 804,4025 v1@814,4015 ; 354,4066 392,4104 v1(581,4104) ; 354,4145 395,4186 484,4186 548,4250 656,4250 895,4489 1116,4489 1197,4408 1197,4337.93 ; 354,4224 361,4224 401,4264 469,4264 528,4323 v1@533,4323 ; 354,4303 462,4411 v1(535,4411) v1@537,4411 ; 432,3987 440,3979 v1(810,3979) ; 432,4224 441,4233 493,4233 589,4329 589,4415 799,4625 1010,4625 1047,4662 1047,4704.07 ; 432,4303 438,4303 501,4366 v1(535,4366) ; v1(625,4220) 701,4220 928,4447 1099,4447 1147,4399 1147,4337.93 ; v1@632,4322 833,4523 1090,4523 1197,4630 1197,4704.07 ; v1(636,4369) 828,4561 1059,4561 1147,4649 1147,4704.07 ; v1@639,4416 816,4593 1034,4593 1097,4656 1097,4704.07 ; 761,5183 761,5137 788,5110 1238,5110 ; 861,5183 861,5156 879,5138 1209,5138 1222,5151 1269,5151 1297,5123 1297,5119 1299,5117 ; 961,5183 v1(1066,5183) ; 1097,4068.07 1098,4067.07 v1(1098,4000) ; 1247,3453 v1(1247,3470) ; v1(1247,3780) 1247,4068.07 v1(1247,4136) ; v1(1247,4605) 1247,4704.07 v1(1247,4775) ; v1(1251,5184) 1252,5183 1325,5183 1351,5157 1351,5111 1349,5109 ; 1297,3453 v1(1297,3470) ; v1(1297,3780) 1297,4068.07 v1(1297,4136) ; v1(1297,4605) 1297,4704.07 v1(1297,4775) ; 1298,5098 1305.5,5105.5 ; 1347,3453 v1(1347,3470) ; v1(1347,3780) 1347,4068.07 v1(1347,4136) ; v1(1347,4605) 1347,4704.07 v1(1347,4775) ; v1(1689,4889) 1689,5126 1730,5167 1730,5179 ; 1730,5101 1730,4758 v1(1733,4755) ; v1@1732,4651 1732,4517.93 1735.93,4514 ; 1735.93,4314 1802,4314 1826,4338 1826,4649 ; v1(1766,4889) 1766,5129 1807,5170 1807,5179 ; 1807,5101 1807,4778 1826,4759 v1(2020,4759) ; v1(1885,4661) 1885,4452 2023,4314 2102.07,4314 ; 1886,5101 1886,4889 v1@1889,4886 ; 1886,5179 1849,5142 1849,4878 1881,4846 v1(1963,4846) ; v1(1927.5,5038.5) 1927,5039 1927,5127 1965,5165 1965,5180 ; v1@1929,4663 1929,4481 2047,4363 2101.07,4363 2102.07,4364 ; v1(1965,4889) 1965,4901 1965,5102 ; v1@1980,4663 1980,4497 2063,4414 2102.07,4414 ; v1(2005,4975) 2005,5138 2044,5177 2044,5180 ; v1@2023,4660 2026,4657 2026,4508 2070,4464 2102.07,4464 ; v1@2044,4828 2044,5102 ; 2123,5101 2123,4968 2250,4841 v1(2676,4841) ; 2123,5179 2088,5144 2088,4937 2257,4768 v1(2549,4770) ; 2202,5101 2202,5010 v1(2289,4923) ; 2202,5179 2164,5141 2164,4991 2284,4871 v1(2632,4871) ; 2281,5101 2281,5035 2369,4947 v1(2910,4947) ; 2281,5179 2281,5168 2243,5130 2243,5028 2359,4912 2840,4912 v1(2895,4857) ; v1(2322,5047) 2322,5133 2321,5134 2360,5173 2360,5179 ; v1(2364,4585) 2366.93,4582.07 2366.93,4514 ; 2366.93,4314 2367.93,4315 v1(2515,4315) ; 2366.93,4364 v1(2462,4364) ; 2366.93,4464 2395,4464 2419,4488 2419,4582 v1(2412,4589) ; 2439,5179 2479,5139 2479,5083 2504,5058 3026,5058 3131,4953 v1(3131,4934) ; 2518,5101 3035,5101 3169,4967 3169,4938 v1(3171.5,4935.5) v1@3174,4933 ; 2547,4659 2547,4445 2678,4314 2733.07,4314 ; v1@2591,4669 2591,4459 2684,4366 2731.07,4366 2733.07,4364 ; v1(2634,4670) 2634,4455 2675,4414 2733.07,4414 ; v1@2677,4669 2678,4668 2678,4476 2689,4465 2732.07,4465 2733.07,4464 ; 2982.93,4314 3039,4314 3133,4408 3133,4616 v1@3092,4657 ; 2982.93,4364 2984.93,4362 3035,4362 3091,4418 3091,4612 3053,4650 v1@3053,4658 ; 2982.93,4464 2984.93,4462 3029,4462 3056,4489 3056,4605 3018,4643 v1@3018,4655 ; v1(3011,4949) 3017,4943 3017,4794 3018,4793 v1(3018,4789) ; v1(3131,4664) 3210,4585 3210,4379 3275,4314 3349.07,4314 ; v1@3173,4665 3252,4586 3252,4409 3297,4364 3349.07,4364 ; v1(3233,4664) 3293,4604 3293,4432 3309,4416 3347.07,4416 3349.07,4414
  Top Layer w19.68: v1(1247,4922) 1247,5105 ; v1(1298,4922) 1298,5098 ; 2982,5025 3003,5025 3068,4960 3068,4917 3190,4795 v1(3280,4795)
  Top Layer w20: 353,3750 393,3790 v1(799,3790) ; 353,3829 393,3869 1106,3869 1197,3778 1197,3701.93 ; 354,3515 354,3390 376,3368 v1(379,3368) ; 354,3592 354,3586 392,3548 v1(392,3440) ; 354,3671 393,3632 532,3632 535,3629 v1(535,3633) ; 431,3750 434,3747 v1@794,3747 ; 431,3829 812,3829 940,3701 996.07,3701 997,3701.93 ; 432,3515 432,3392 726,3098 969,3098 997,3070 997,3018.93 ; 432,3592 566,3592 832,3326 v1(917,3326) ; 432,3671 v1(483,3671) ; 432,3908 1001,3908 1047,3954 1047,4068.07 ; 432,4066 514,4066 v1(516,4064) ; 432,4145 780,4145 972.93,4337.93 997,4337.93 ; v1@481,3553 482,3552 482,3545 792,3235 1083,3235 1147,3299 1147,3385.07 ; v1(497,3439) 528,3439 780,3187 1100,3187 1197,3284 1197,3385.07 ; v1(533,4177) 543,4187 751,4187 978,4414 1036,4414 1047,4403 1047,4337.93 ; v1(534,3553) 809,3278 1064,3278 1097,3311 1097,3385.07 ; v1(567.5,3320.5) 747,3141 1124,3141 1197,3068 1197,3018.93 ; v1(909,3786) 1019,3786 1047,3758 1047,3701.93 ; v1(909,3825) 1085,3825 1147,3763 1147,3701.93 ; 1047,3385.07 1046,3384.07 1048,3382.07 v1(1048,3326) ; v1(1147,3988) 1147,4068.07 ; 1197,4068.07 1198,4067.07 v1(1198,3942) ; v1(1211,5033) 1213,5035 1247,5035 ; 1247,3385.07 1247,3453 ; 1297,3385.07 1297,3453 ; 1297,3701.93 1299,3703.93 ; 1306.5,5109.5 1306.5,4985 v1@1346,4985 ; 1346,5100 1412,5100 1424,5088 1424,4937 v1(1409,4922) ; 1347,3385.07 1347,3453 ; v1(1349,4922) 1387,4960 1387,5099 1359,5099 1349,5109 ; 1734.93,4413 1735.93,4414 ; v1(1901,4164) 2102.07,4164 2208,4164 v1(2211,4167) ; v1(1901,4214) 2102.07,4214 2208,4214 v1(2211,4217) ; v1(1901,4264) 2102.07,4264 2208,4264 v1(2211,4267) ; 2318,3579 2320,3581 ; 2360,5101 2468,4993 2943,4993 2977,4959 v1(2977,4791) ; 2405.5,3862.5 2421.5,3862.5 ; 2439,5101 2439,5081 2495,5025 2982,5025 ; v1(2482,3489) v1@2484,3489 ; v1(2499,4164) 2733.07,4164 v1(2821,4164) ; v1(2499,4214) 2733.07,4214 v1(2821,4214) ; v1(2499,4264) 2733.07,4264 v1(2821,4264) ; 2518,5179 3071,5179 v1(3150,5100) ; v1(2544,3428) 2590,3382 2911,3382 ; v1(3108,4164) 3349.07,4164 ; v1(3108,4214) 3349.07,4214 ; v1(3108,4264) 3349.07,4264 ; 3419,4464 3523,4568 v1(3523,4593)
  Top Layer w25: 1097,4267 v1(1391,4267) ; v1(1689,3906) 1689,3904 1866,3727 2370,3727 2420,3677 2522,3575 v1(2524,3575) ; v1(2516,3865) 2683,3698 2911,3698 ; v1(2601,3494) 2631,3464 2892,3464 ; 3350,4909 3434,4993 3526,4993 3556,4963
  Top Layer w29.53: 1096,3017.93 1096,2922.46 v1@1464.54,2922.46 ; 1097,3596.46 1097,3701.93 ; 1097,4267 1097,4337.93 ; 1098,3595.46 v1@1466,3595.46 ; 1734.93,4413 1620,4413 1620,3863 1904,3579 2318,3579 2394,3579 v1@2484,3489 ; 2220,3774 2220,3777 2220,4102 2270.07,4152.07 2270.07,4414 2366.93,4414 ; v1(2267,3443) 2497,3443 2579,3525 2579,3548.5 ; 2320,3581 2320,3677 ; 2320,3777 2405.5,3862.5 2572,4029 2761,4029 2901,4169 2901,4418.54 2905.54,4414 2982.93,4414 ; 2420,3777 2420,3741 2579,3582 2579,3548.5 ; 2421.5,3862.5 2665,3619 2911,3619 ; 2578,3548.5 2579,3548.5 ; 2911,3540 2587.5,3540 2579,3548.5 ; 3349.07,4464 3419,4464
  Top Layer w35: 3221,4966 3221.49,4965.51 3221.49,4908
  Top Layer w39.37: v1(886,3488) 886.49,3488.49 940,3488.49 ; v1@889,4828 942.51,4828 ; v1@890,4177 943.51,4177 ; 993.54,4707.53 993.54,4860 1010.54,4877 1536,4877 1566,4847 ; 997,3385.07 997,3514.54 993.54,3518 1549,3518 ; 997,4068.07 997,4204.54 996.54,4205 1549,4205 ; 1096,2855.54 1520.54,2855.54 1549,2884 1549,3285 ; 1247,3018.93 1297,3018.93 1347,3018.93 v1@1396.07,3018.93 ; 1247,3701.93 1297,3701.93 1347,3701.93 v1@1396.07,3701.93 ; 1247,4337.93 1297,4337.93 1347,4337.93 v1@1396.07,4337.93 ; 1622,4899 1570,4847 1566,4847 ; 1628,3291 1555,3291 1549,3285 ; v1@1735.93,4114.93 1735.93,4164 1735.93,4214 1735.93,4264 ; 2102.07,4514 2102.07,4708.93 2097,4714 ; 2160.49,4604 v1@2214,4604 ; 2270,4481 2270,4713.07 2267,4716.07 ; v1@2366.93,4114.93 2366.93,4164 2366.93,4214 2366.93,4264 ; 2733.07,4514 2733.07,4643 2733.07,4716.07 ; 2790.49,4616 v1@2844,4616 ; 2901,4485.46 2901,4717 ; v1(2982,4114) 2982.93,4114.93 2982.93,4164 2982.93,4214 2982.93,4264 ; v1(2982,4625) 2982,4514.93 2982.93,4514 ; 3282.51,4908 3283.51,4909 3350,4909 ; 3343,4717 2901,4717 ; 3349.07,4514 3351,4515.93 3351,4909 ; 3407.49,4601 v1@3461,4601 ; 1549,3285 1549,3518 ; 1549,3518 1549,4205 ; 1549,4205 1549,4668 1642.5,4761.5 1642.5,4770.5 ; 1566,4847 1642.5,4770.5 ; 1642.5,4770.5 1699,4714 2097,4714 ; 2097,4714 2099.07,4716.07 2267,4716.07 ; 2267,4716.07 2733.07,4716.07 ; 2733.07,4716.07 2734,4717 2901,4717
  Bottom Layer w15: v1(2482,3489) 2483,3489 v1(2544,3428) v1@2545,3428
  Bottom Layer w15.75: v1(810,3942) v1(1198,3942) ; v1(810,3979) 820,3969 1128,3969 v1(1147,3988) ; v1@814,4015 839,4015 854,4000 v1(1098,4000) ; v1(1211,5033) 1410,5033 1519,4924 1519,4646 v1(1901,4264) ; v1(1247,3470) v1(1247,3780) ; v1(1247,4136) v1(1247,4605) ; v1(1247,4775) 1249,4777 1246,4780 1246,4917 v1@1251,4922 ; v1(1297,3470) v1(1297,3780) ; v1(1297,4136) v1(1297,4605) ; v1(1297,4775) 1297,4920 v1@1299,4922 ; v1@1346,4985 1418,4985 1489,4914 1489,4626 v1(1901,4214) ; v1(1347,3470) v1(1347,3780) ; v1(1347,4136) v1(1347,4605) ; v1(1347,4775) 1347,4920 v1(1349,4922) ; v1(1409,4922) 1409,4656 v1(1901,4164) ; v1(2211,4167) 2496,4167 v1(2499,4164) ; v1(2211,4217) 2496,4217 v1(2499,4214) ; v1(2211,4267) 2496,4267 v1(2499,4264)
  Bottom Layer w20: v1@381.5,3366 522,3366 v1(567.5,3320.5) ; v1(392,3440) 400,3432 490,3432 v1(497,3439) ; v1@481,3553 481,3546 v1@483,3544 ; v1(483,3671) v1(483,3553) v1@483,3544 ; 492,3535 v1@483,3544 ; v1(516,4064) 516,4160 v1(533,4177) ; v1@533,4323 v1(535,4323) 631,4323 v1@632,4322 ; v1(534,3553) 534,3557 535,3558 v1(535,3633) ; v1(535,4366) 633,4366 v1(636,4369) ; v1@537,4411 634,4411 v1@639,4416 ; v1(581,4104) 581,4176 585,4180 v1(625,4220) ; v1@794,3747 v1(799,3747) 870,3747 v1(909,3786) ; v1(799,3790) 843,3790 878,3825 v1(909,3825) ; v1(917,3326) v1(1048,3326) v1@1047,3325 ; v1(1066,5183) 1067,5184 v1(1251,5184) ; v1(1689,4889) 1741,4837 1740,4837 1826,4751 v1(1826,4661) ; v1(1732,4661) 1733,4662 v1(1733,4755) ; v1(1766,4889) 1766,4878 1885,4759 v1(1885,4661) ; v1@1889,4886 1889,4832 1929,4792 v1@1929,4663 ; v1(1927.5,5038.5) 1927.5,4971.5 1946,4953 1972,4927 2049,4927 2121,4855 2387,4855 2481,4761 2481,4383 v1(2462,4364) ; v1(1963,4846) 1980,4829 v1@1980,4663 ; v1(1965,4889) 2036,4889 2044,4881 2111,4814 2374,4814 2412,4776 v1(2412,4589) ; v1(2005,4975) 2051,4975 2060,4966 2136,4890 2411,4890 2516,4785 2516,4316 v1(2515,4315) ; v1(2020,4759) 2020,4663 v1@2023,4660 ; v1(2043,4828) 2087,4784 2335,4784 2364,4755 v1(2364,4585) v1@2366,4583 ; v1(2289,4923) 2519,4923 2594,4848 v1@2594,4676 ; v1(2322,5047) 2379,4990 2747,4990 2829,4908 3033,4908 3092,4849 v1(3092,4664) ; v1(2524,3575) 2524,3573 2634,3463 2737,3463 ; v1@2544,3298 v1(2544,3300) ; v1@2549,4670 v1(2549,4770) ; v1(2632,4871) 2632,4672 v1(2634,4670) ; v1(2676,4841) 2676,4670 v1@2677,4669 ; 2742,3698 2751.5,3698 ; v1(2821,4164) v1(3108,4164) ; v1(2821,4214) v1(3108,4214) ; v1(2821,4264) v1(3108,4264) ; v1(2895,4857) 3035,4857 3055,4837 3055,4666 v1(3053,4664) ; v1(2910,4947) v1@3011,4947 ; v1(2977,4791) 2977,4630 v1(2982,4625) ; v1(3015,4664) 3015,4786 v1(3018,4789) ; v1@3131,4670 v1(3131,4934) ; v1(3150,5100) 3233,5017 v1(3233,4664) ; v1@3171.5,4665 v1(3171.5,4935.5) ; v1(3280,4795) 3390,4795 3523,4662 v1(3523,4593)
  Bottom Layer w25.71: v1@1391,4263 1391,4207 v1@1691,3907
  Bottom Layer w29.53: v1(1465,2922) 1918,3375 2426,3375 2489,3375 2544,3320 v1(2544,3300) ; v1(1466,3594) 1802,3594 1953,3443 v1(2267,3443) ; 2220,3677 2426,3471 2426,3394 ; 2220,3777 2311,3868 v1@2516,3868
  other v1: 1397,3018 1397,3701 810,4015 1735,4114 2366,4114 889.51,4176.51 636,4322 1397,4337 636,4416 3461.49,4601.49 2214.49,4604.49 2844.49,4616.49 1929,4661 1980,4661 2023,4661 3173,4664 2591,4670 2677,4670 2549,4671 888.51,4827.51 1889,4889 1349,4985

## Polygon pours and split planes (outlines as drawn)
no net on Bottom Layer "AGND" (solid, remove dead copper, pour order 4): 3617,5253 292,5253 292,2656 3617,2656 3617,2991
AGND on Bottom Layer "AGND_L02_P002" (solid, remove dead copper, pour order 2): 292,5253 3617,5253 3617,2656 292,2656

## Silkscreen, mask and mechanical layers (free items; w line width, h text height)
Top Overlay:
  text "A" at 748,5110.76 h39.37
  text "B" at 854,5111 h39.37
  text "C" at 953,5111 h39.37
  text "A" at 1238,5041.76 h39.37
  text "B" at 1293,5042 h39.37
  text "C" at 1338,5042 h39.37
  text "U1_MUX_1_Out" at 2590,3688 h39.37
  text "U2_MUX_1_Out" at 2590,3607.8 h39.37
  text "U2_MUX_2_Out" at 2590,3525.6 h39.37
  text "U1_MUX_2_Out" at 2590,3451.4 h39.37
  text "U3_MUX_1_Out" at 2590,3371.2 h39.37
  text "U2_MUX_2_Out" at 2590,3292 h39.37
  text "William McKnight" at 1830,3047 h39.37
  text "z" at 2172,2999 h78.74
  text "REV 0.4" at 1990.16,2994 h39.37
  text "3" at 2547,2994 h78.74
  text "Top Board Thermistor PCB" at 2030,2891 h59.06
Board Outline:
  the board outline again, w0.49